# Altium PCB beovox-poe.PcbDoc (part 1 of 3)
Units mm, origin at the board's own origin, x right, y up, seen from the top; angles counter-clockwise.
Board outline 92 x 70 mm, 4 copper layers (Top Layer, Layer 2, Layer 3, Bottom Layer), stack 1.576 mm thick; 96 components, 81 nets, 294 pads, 439 vias.
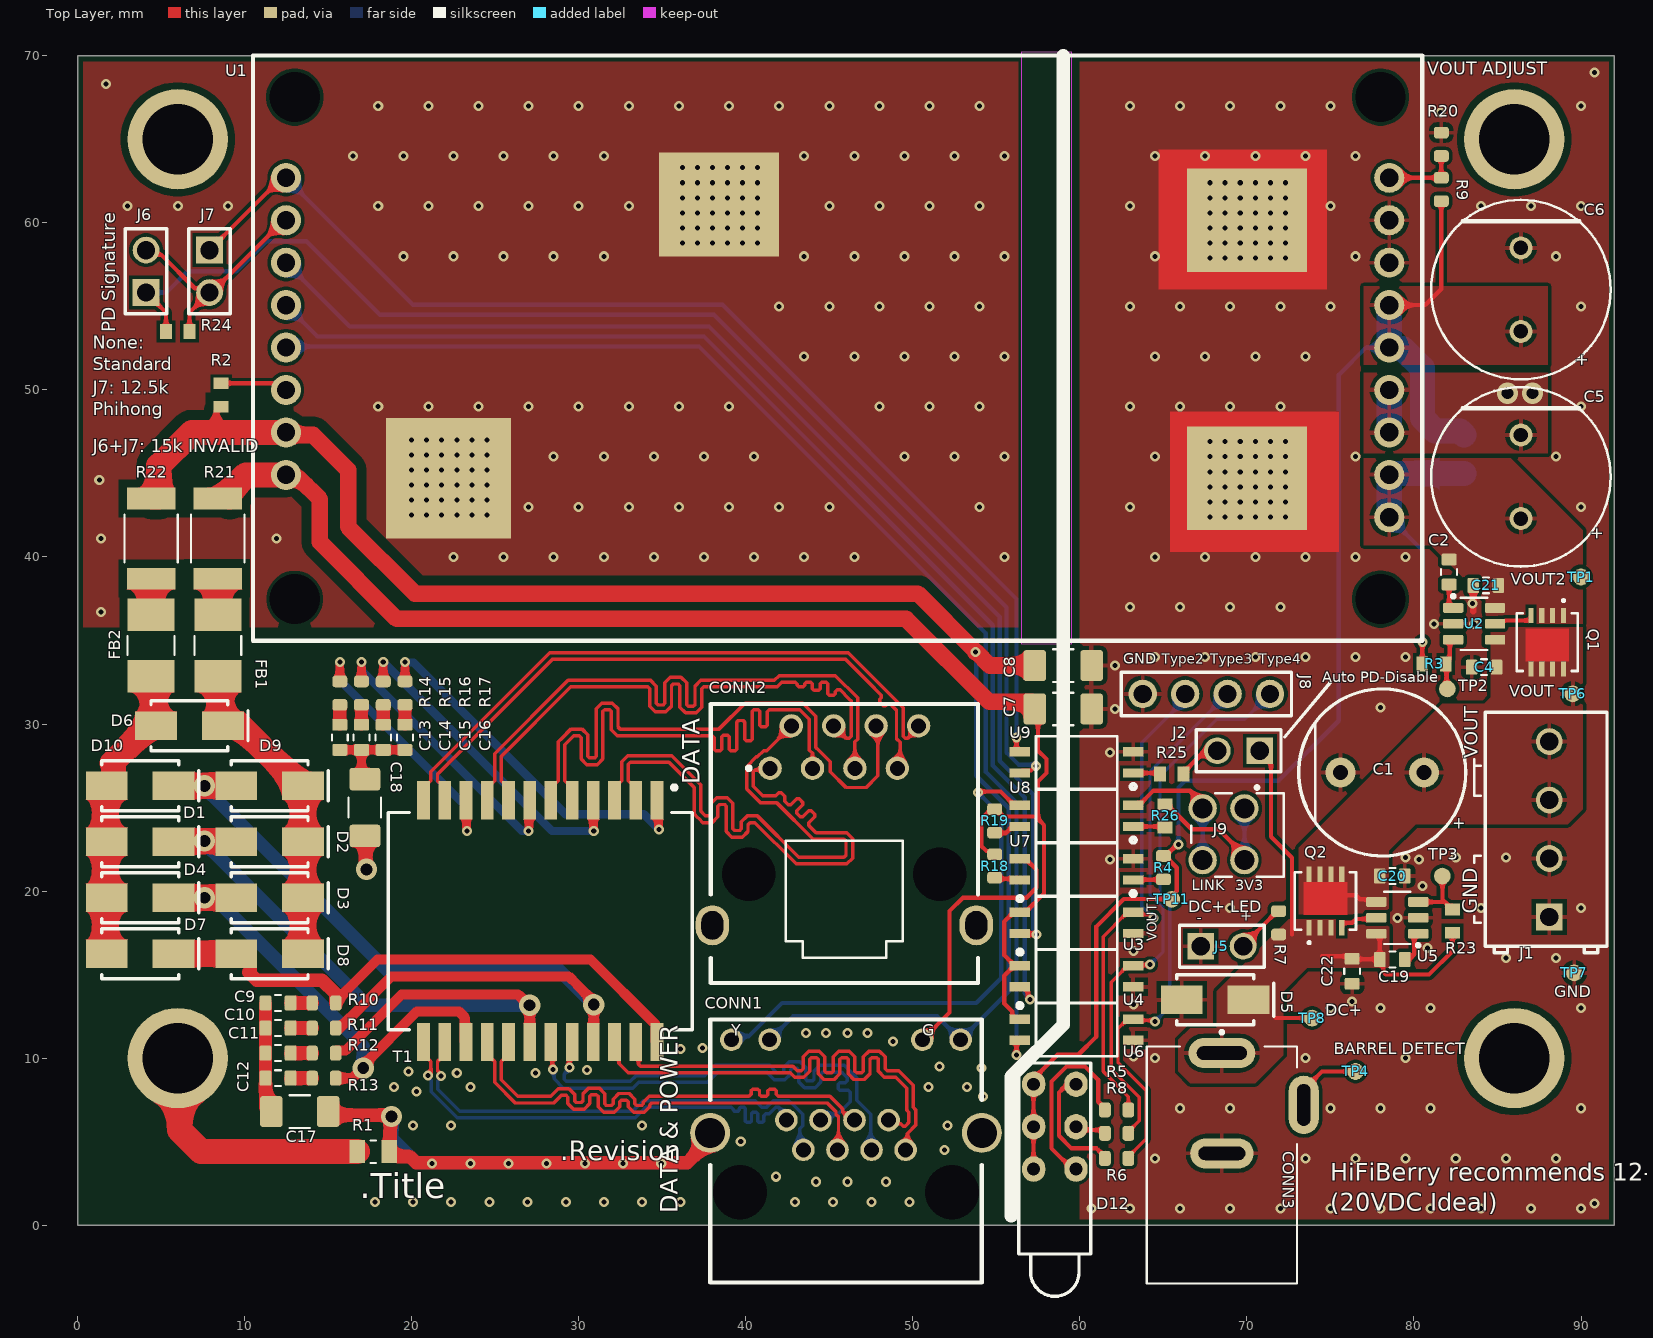
[diagram p0: Top Layer view]
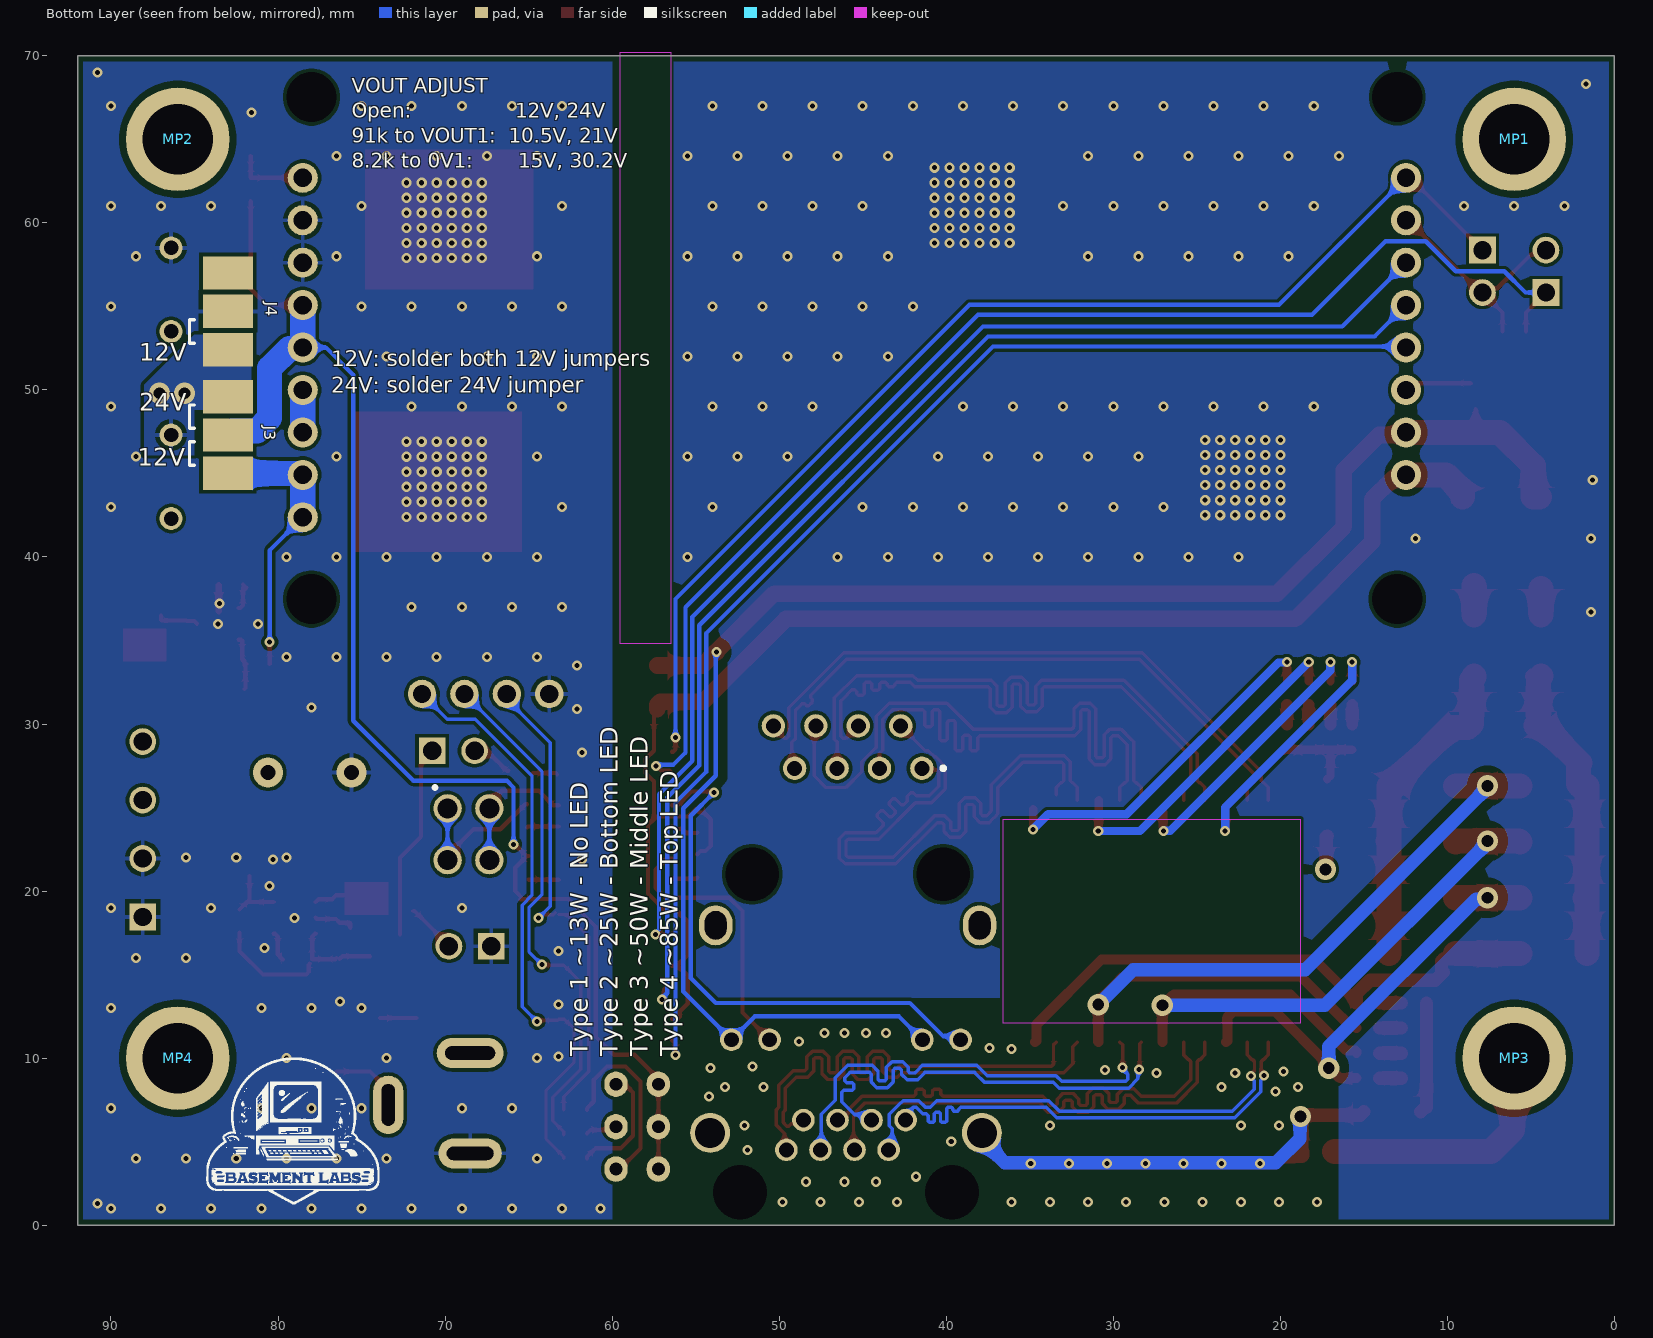
[diagram p1: Bottom Layer view, seen from below]
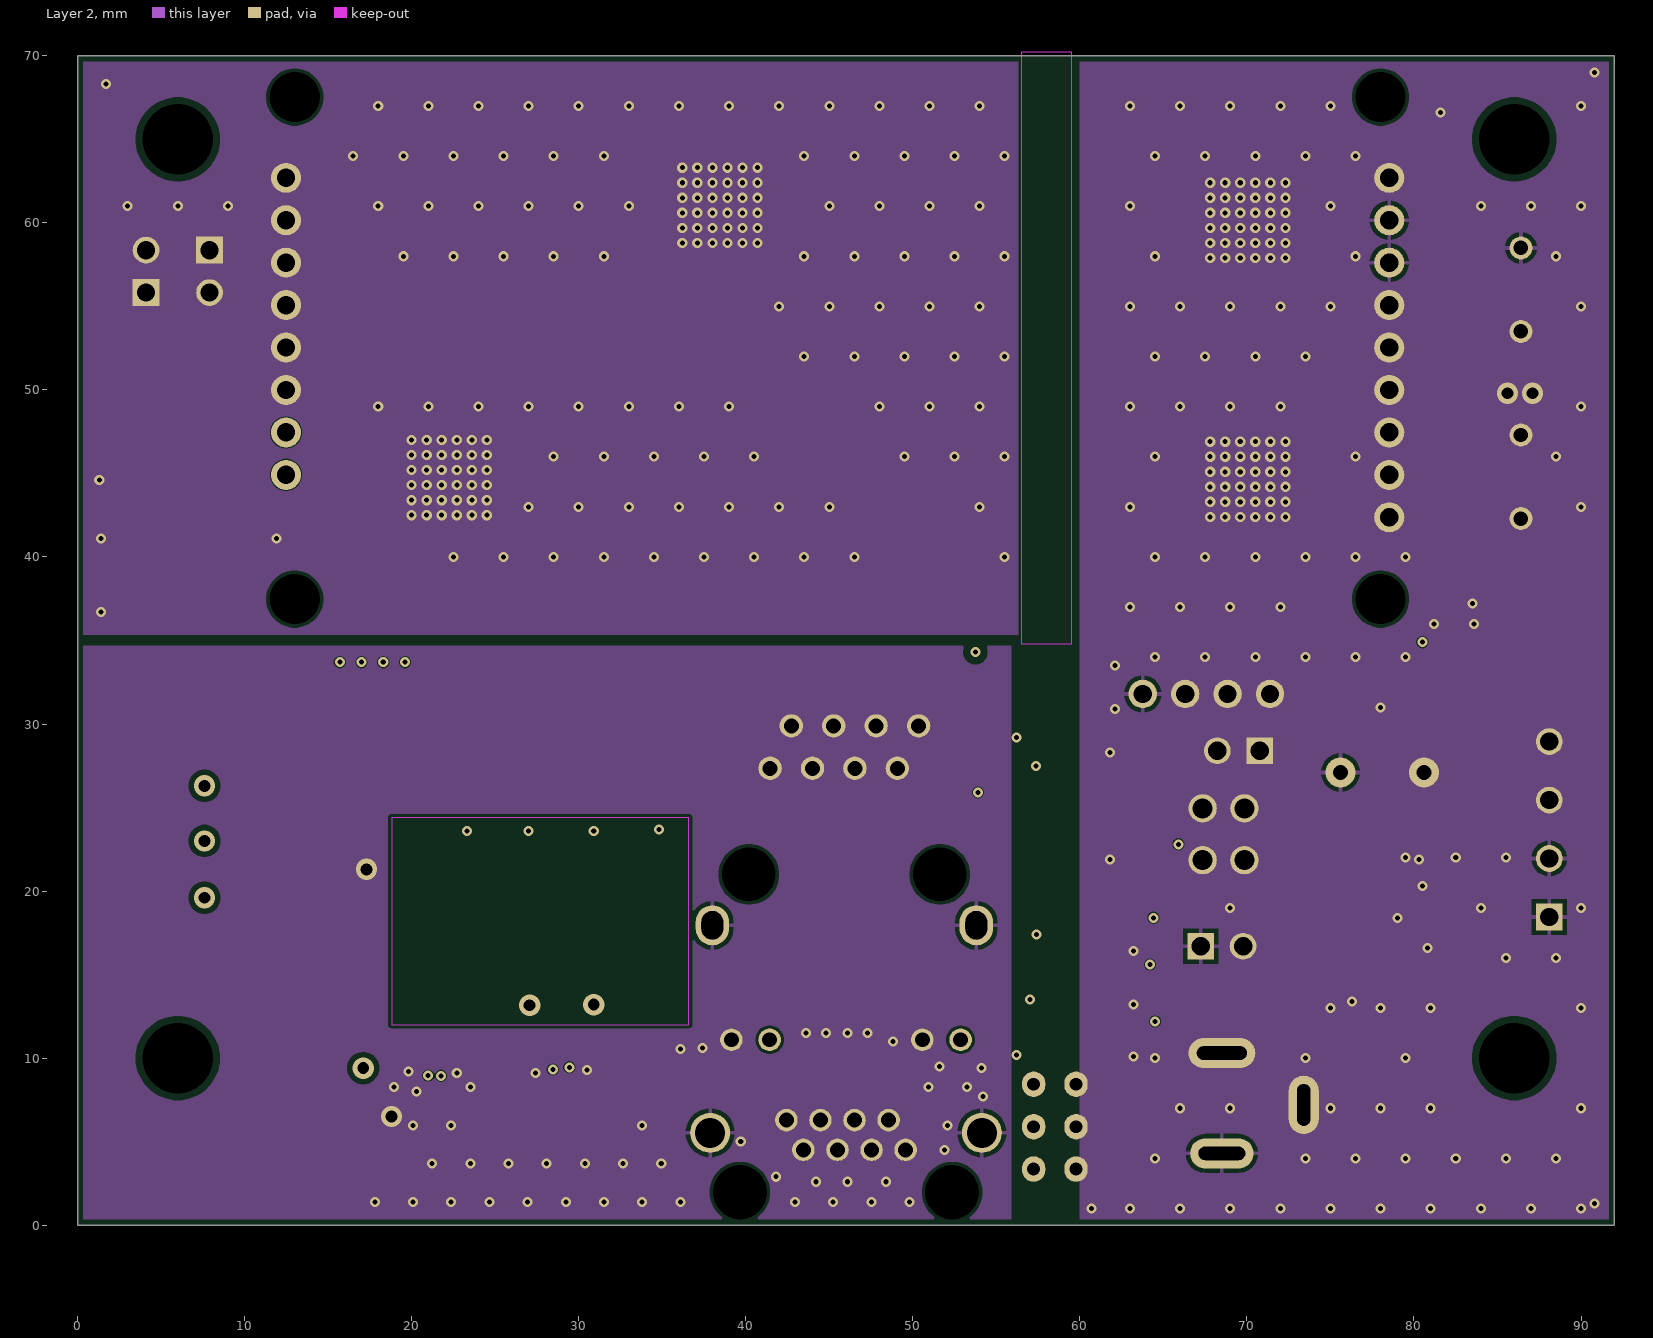
[diagram p2: Layer 2]
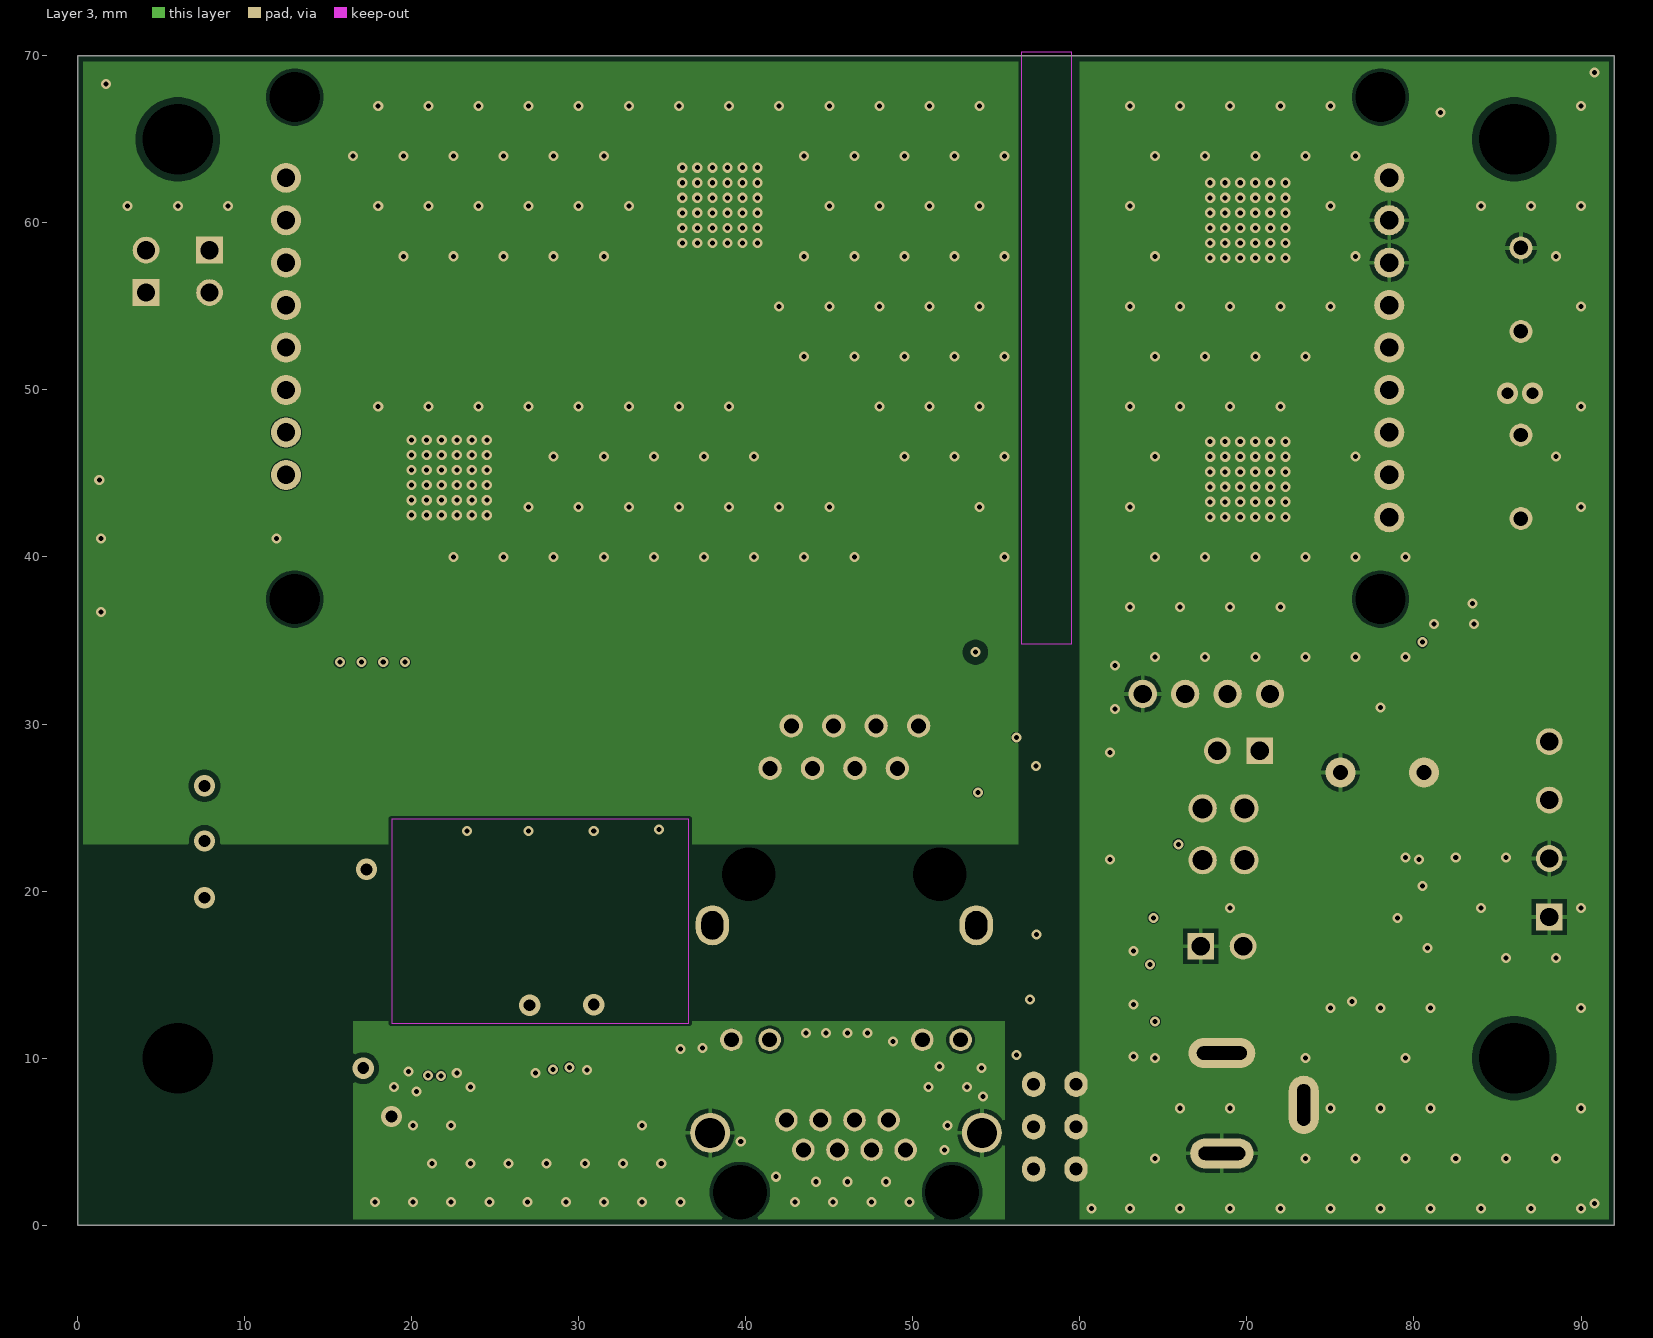
[diagram p3: Layer 3]
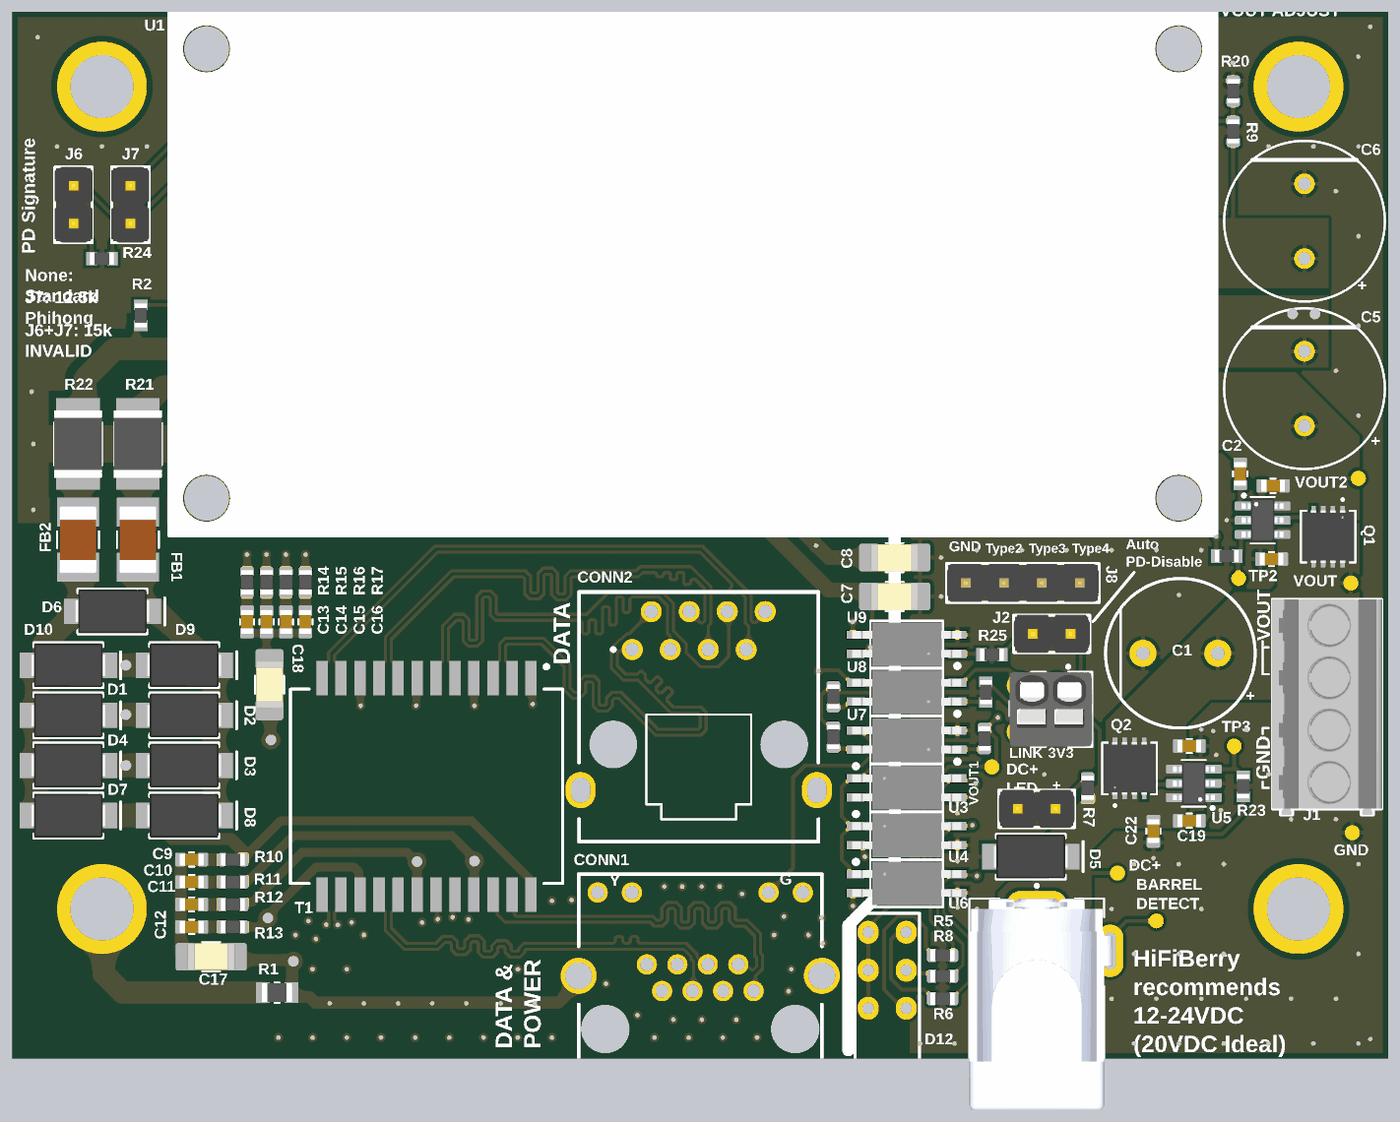
[diagram p5: 3D render of the assembled board from above, using the file's embedded part models]

## Layer stack, top to bottom
Top Solder: solder mask 0.0254, Solder Resist, Dk 3.8
Top Layer: signal copper 0.035
Dielectric 2: prepreg 0.203, PP-006, Dk 4.4
Layer 2: signal copper 0.035
Dielectric 1: core 1.03, FR-4, Dk 4.6
Layer 3: signal copper 0.035
Dielectric 3: prepreg 0.203, PP-006, Dk 4.4
Bottom Layer: signal copper 0.035
Bottom Solder: solder mask 0.0254, Solder Resist, Dk 3.8

## Board outline
0,0 0,70 92,70 92,0

## Design rules (kind name [scope] priority, off if disabled: settings)
BoardOutlineClearance [not (OnLayer('Top Overlay') or OnLayer('Bottom Overlay'))] p1: gap=0.345 ignorepadtopadclearanceinfootprint=FALSE
Clearance Clearance_hole [HasFootprint('SMTSOM380_PlatedScrew')] p1: gap=0.16 ignorepadtopadclearanceinfootprint=TRUE except(0.2: Arc-Hole Track-Hole SMDPad-Hole THPad-Hole Via-Hole Fill-Hole Poly-Hole Region-Hole Text-Hole; 0.4: Arc-Poly Track-Poly SMDPad-Poly THPad-Poly Via-Poly Fill-Poly Poly-Poly)
Clearance Clearance_diff [InDifferentialPairClass('DIFF100A') or InDifferentialPairClass('DIFF100B') vs InDifferentialPairClass('DIFF100A') or InDifferentialPairClass('DIFF100B')] p2: gap=0.152 ignorepadtopadclearanceinfootprint=TRUE except(0.2: Arc-Hole Track-Hole SMDPad-Hole THPad-Hole Via-Hole Fill-Hole Poly-Hole Region-Hole Text-Hole; 0.762: Arc-Arc Arc-Track Arc-Poly Track-Track Track-Poly SMDPad-Poly THPad-Poly Via-Poly Fill-Poly Poly-Poly)
Clearance Clearance_HV [InNetClass('HV') or InNet('BARREL_IN') or HasFootprint('SMTSOM380_PlatedScrew')] p3: gap=0.2 ignorepadtopadclearanceinfootprint=TRUE except(0.37: SMDPad-SMDPad SMDPad-THPad THPad-THPad; 0.4: THPad-Poly; 0.5: SMDPad-Poly; 0.6: Arc-Poly Track-Poly Via-Poly Fill-Poly Poly-Poly)
Clearance [All] p4: gap=0.16 ignorepadtopadclearanceinfootprint=TRUE except(0.2: Arc-Poly Arc-Hole Track-Poly Track-Hole SMDPad-Poly SMDPad-Hole THPad-Poly THPad-Hole Via-Poly Via-Hole Fill-Poly Fill-Hole Poly-Poly Poly-Hole Region-Hole Text-Hole)
DiffPairsRouting DiffPairsRouting_100 [InDifferentialPairClass('All Differential Pairs')] p1: maxlimit=0.19 minlimit=0.127 mostfreqgap=0.19 toplayer_mingap=0.19 toplayer_minwidth=0.206 toplayer_maxwidth=0.206 toplayer_prefwidth=0.206 bottomlayer_mingap=0.19 bottomlayer_minwidth=0.206 bottomlayer_maxwidth=0.206 bottomlayer_prefwidth=0.206 impedanceprofiledriven=TRUE impedanceprofileid={2DB0FAA2-FB86-4255-B0C8-703C372E21C5} impedanceprofilevalue=100.000000 maxuncoupledlength=20
HoleSize [All] p1: absolutevalues=TRUE maxlimit=6.3 minlimit=0.2 maxpercent=80.000 minpercent=20.000
Length [InDifferentialPairClass('DIFF100A') or InDifferentialPairClass('DIFF100B')] p1: maxlimit=50 minlimit=0
MatchedLengths intra-pair_DiffB [InDifferentialPairClass('DIFF100B')] p1: tolerance=0.25 checknetsindiffpair=TRUE checkdiffpairvsdiffpair=FALSE checkxsignals=FALSE checkothers=FALSE
MatchedLengths intra-pair_DiffA [InDifferentialPairClass('DIFF100A')] p2: tolerance=0.25 checknetsindiffpair=TRUE checkdiffpairvsdiffpair=FALSE checkxsignals=FALSE checkothers=FALSE
MatchedLengths inter-pair_DiffB [InDifferentialPairClass('DIFF100B')] p3: tolerance=2 checknetsindiffpair=FALSE checkdiffpairvsdiffpair=TRUE checkxsignals=TRUE checkothers=TRUE
MatchedLengths inter-pair_DiffA [InDifferentialPairClass('DIFF100A')] p4: tolerance=2 checknetsindiffpair=FALSE checkdiffpairvsdiffpair=TRUE checkxsignals=TRUE checkothers=TRUE
MinimumSolderMaskSliver [not (HasFootprint('CONN-SMD_KH-WB205-F20M-03L'))] p1: minsoldermaskwidth=0.076
PolygonConnect PolygonConnect_TP [IsTestpoint] p1: connectstyle=Relief reliefconductorwidth=0.254 reliefentries=4 polygonreliefangle="90 Angle" airgapwidth=0.254
PolygonConnect PolygonConnect_tht [IsThruPin] p2: connectstyle=Relief reliefconductorwidth=0.254 reliefentries=4 polygonreliefangle="90 Angle" airgapwidth=0.254
PolygonConnect PolygonConnect_direct [All vs not InNet('GND')] p3: connectstyle=Direct reliefconductorwidth=0.254 reliefentries=4 polygonreliefangle="90 Angle" airgapwidth=0.254
PolygonConnect PolygonConnect_direct2 [isvia] p4: connectstyle=Direct reliefconductorwidth=0.254 reliefentries=4 polygonreliefangle="90 Angle" airgapwidth=0.254
PolygonConnect [All] p5: connectstyle=Relief reliefconductorwidth=0.254 reliefentries=4 polygonreliefangle="90 Angle" airgapwidth=0.254
RoutingVias [All] p1: holewidth=0.3 width=0.6 viastyle="Through Hole" minholewidth=0.3 minwidth=0.6 maxholewidth=0.711 maxwidth=1.27
SilkToSilkClearance [All] p1: silktosilkclearance=0.05
SilkToSolderMaskClearance [IsPad] p1: minsilkscreentomaskgap=0.05 clearancetoexposedcopper=TRUE
SolderMaskExpansion SolderMaskExpansion_via [IsVia and WithinRoom('tent')] p1: expansion=0.102 istentingtop=TRUE
SolderMaskExpansion [IsVia] p2 off: expansion=0.05 istentingtop=TRUE
Width [All] p1: maxlimit=1.5 minlimit=0.152 preferedwidth=0.254
25 further rules are at their usual default settings.

## Classes and differential pairs
differential pair class DIFF100A: TxRxA TxRxB TxRxC TxRxD
differential pair class DIFF100B: TxRxA1 TxRxB1 TxRxC1 TxRxD1
net class HV: NetD1_2 NetD3_1 NetD7_2 NetD9_1 NetFB1_2 NetFB2_2 VIN2+ VIN2- VIN+ VIN-
differential pair TxRxD: +TxRxD_P -TxRxD_N
differential pair TxRxD1: +TxRxD1_P -TxRxD1_N
differential pair TxRxC: +TxRxC_P -TxRxC_N
differential pair TxRxC1: +TxRxC1_P -TxRxC1_N
differential pair TxRxB: +TxRxB_P -TxRxB_N
differential pair TxRxB1: +TxRxB1_P -TxRxB1_N
differential pair TxRxA1: +TxRxA1_P -TxRxA1_N
differential pair TxRxA: +TxRxA_P -TxRxA_N

## Components (designator, comment, footprint, x,y, rotation, side; value= is the part's Value field where it differs from the comment)
C1 "150uF" CAP_CAN_10D_16H_THT 78.1,27.1 r180 top
C2 "100nF" CAP_0603_SK 82.1,39.1 r90 top
C4 "100nF" CAP_0603_SK 84.2,33.4 r0 top
C5 "1000uF 35V" CAP_TH_5_10X20 86.4,44.8 r90 top value=1000uF
C6 "1000uF 35V" CAP_TH_5_10X20 86.4,56 r90 top value=1000uF
C7 "4.7nF 2kV" CAP_1206_SK 59,30.9 r0 top
C8 "4.7nF 2kV" CAP_1206_SK 59,33.5 r0 top
C9 "10nF" CAP_0603_SK 12,13.3 r0 top
C10 "10nF" CAP_0603_SK 12,11.8 r0 top
C11 "10nF" CAP_0603_SK 12,10.3 r0 top
C12 "10nF" CAP_0603_SK 12,8.8 r0 top
C13 "10nF" CAP_0603_SK 15.7,29.2 r90 top
C14 "10nF" CAP_0603_SK 17,29.2 r90 top
C15 "10nF" CAP_0603_SK 18.3,29.2 r90 top
C16 "10nF" CAP_0603_SK 19.6,29.2 r90 top
C17 "1000pF 2kV" CAP_1206_SK 13.3,6.8 r180 top
C18 "1000pF 2kV" CAP_1206_SK 17.2,25 r90 top
C19 "100nF" CAP_0603_SK 78.7,15.9 r180 top
C20 "100nF" CAP_0603_SK 78.7,20.9 r180 top
C21 "100nF" CAP_0603_SK 84.3,38.3 r0 top
C22 "100nF" CAP_0603_SK 76.3,15.2 r90 top
CONN1 "R-RJ45R08P-C000" R-RJ45R08P-C000 46,5.4 r0 top locked
CONN2 "KH-5224-8P8C" CONN_RJ45_KH-5224-8P8C 45.9,21 r180 top locked
CONN3 "PJ-050AH" CUI_PJ-050AH 68.5,10.3 r270 top
D1 "SS36" DIOD-SMA-2_V 3.75,22.95 r0 top value="60V 3A"
D2 "SS36" DIOD-SMA-2_V 11.5,22.95 r0 top value="60V 3A"
D3 "SS36" DIOD-SMA-2_V 11.5,19.6 r0 top value="60V 3A"
D4 "SS36" DIOD-SMA-2_V 3.75,19.6 r0 top value="60V 3A"
D5 "SMAJ30A" DIOD-B360A_V 68.1,13.5 r0 top
D6 "SMAJ58A" DIOD-SMA-2_V 6.7,29.9 r0 top value="58V 400W"
D7 "SS36" DIOD-SMA-2_V 3.75,16.25 r0 top value="60V 3A"
D8 "SS36" DIOD-SMA-2_V 11.5,16.25 r0 top value="60V 3A"
D9 "SS36" DIOD-SMA-2_V 11.5,26.3 r0 top value="60V 3A"
D10 "SS36" DIOD-SMA-2_V 3.75,26.3 r0 top value="60V 3A"
D12 "3 Diode Vertical LED Green" MHK33147CGBTD 58.5,5.9 r0 top
FB1 "1k" FB_1810 8.4,34.7 r90 top
FB2 "1k" FB_1810 4.4,34.7 r90 top
J1 "DB125-3.5-4P-GN-S" DB125-3.5-4P-GN-S 88.1,23.7 r90 top
J2 "PZ254V-11-02P" 61300211121 69.5,28.4 r180 top
J3 "JUMPER" "SOLDER_JUMPER_3 LARGE" 83,47.3 r90 bottom
J4 "JUMPER" "SOLDER_JUMPER_3 LARGE" 83,54.7 r90 bottom
J5 "PZ254V-11-02P" 61300211121 68.5,16.7 r0 top
J6 "PZ254V-11-02P" 61300211121 4.1,57.1 r90 top
J7 "PZ254V-11-02P" 61300211121 7.9,57.1 r270 top
J8 "PZ254V-11-04P" HDR_MALE_1x4 67.57,31.8 r180 top
J9 "1770953" 1770953 68.6,23.4 r180 top
MP1 "SMTSOM380BTR" SMTSOM380_PlatedScrew 6,65 r180 bottom
MP2 "SMTSOM380BTR" SMTSOM380_PlatedScrew 86,65 r180 bottom
MP3 "SMTSOM380BTR" SMTSOM380_PlatedScrew 6,10 r180 bottom locked
MP4 "SMTSOM380BTR" SMTSOM380_PlatedScrew 86,10 r180 bottom locked
Q1 "HSBB6066" PPAK3X3_GAS 87.975,34.9 r270 top
Q2 "HSBB6066" PPAK3X3_GAS 74.7,19.4 r90 top
R1 "0" RES_0805 17.7,4.4 r0 top
R2 "0" RES_0603#1 8.6,49.7 r270 top
R3 "0" RES_0603#1 81.2,33.6 r180 top
R4 "2.2k" RES_0603#2 65,21.4 r90 top
R5 "2.2k" RES_0603#2 62.2,6.9 r0 top
R6 "2.2k" RES_0603#2 62.2,4 r0 top
R7 "10k" RES_0603#2 71.9,18.1 r90 top
R8 "2.2k" RES_0603#2 62.2,5.5 r0 top
R9 "91k" RES_0603#2 81.633,62 r90 top
R10 "75" RES_0603#2 14.75,13.3 r0 top value=75R
R11 "75" RES_0603#2 14.75,11.8 r0 top value=75R
R12 "75" RES_0603#2 14.75,10.3 r0 top value=75R
R13 "75" RES_0603#2 14.75,8.8 r0 top value=75R
R14 "75" RES_0603#2 15.7,31.85 r90 top value=75R
R15 "75" RES_0603#2 17,31.85 r90 top value=75R
R16 "75" RES_0603#2 18.3,31.85 r90 top value=75R
R17 "75" RES_0603#2 19.6,31.85 r90 top value=75R
R18 "10K" RES_0603#2 54.9,21.5 r90 top
R19 "10K" RES_0603#2 54.9,24.2 r90 top
R20 "8.2k" RES_0603#2 81.633,64.7 r270 top value=10kR
R21 "0" RES_1812 8.4,41.1 r90 top
R22 "0" RES_1812 4.4,41.1 r90 top
R23 "0" RES_0603#1 82.3,18.2 r270 top
R24 "10k" RES_0603#1 6,53.5 r0 top
R25 "2.2k" RES_0603#1 65.5,27 r0 top
R26 "330" RES_0603#1 65.1,24.5 r90 top
T1 "H2415G" XFMR_H2415G 27.7,18.2 r180 top
TP1 "TP" Test_Point#1 90,38.8 r0 top
TP2 "TP" Test_Point#2 82,32.1 r0 top
TP3 "TP" Test_Point#2 81.7,20.9 r0 top
TP4 "TP" Test_Point#2 76.5,9.2 r0 top
TP6 "TP" Test_Point#1 89.5,31.8 r0 top
TP7 "TP" Test_Point#1 89.6,15.1 r0 top
TP8 "TP" Test_Point#1 73.9,12.4 r0 top
TP11 "TP" Test_Point#1 65.5,19.5 r90 top
U1 "AG5800" AG5800 45.5,52.5 r0 top locked
U2 "LM74700QDBVTQ1" SOT95P280X145-6N 83.6,36 r0 top
U3 "OR-3H7B-TP-G" SOIC_(B)(TA)-VG_EVS 59.8,18.1 r0 top value="80V 3750V 50mA"
U4 "OR-3H7B-TP-G" SOIC_(B)(TA)-VG_EVS 59.8,14.9 r0 top value="80V 3750V 50mA"
U5 "LM74700QDBVTQ1" SOT95P280X145-6N 79,18.4 r180 top
U6 "OR-3H7B-TP-G" SOIC_(B)(TA)-VG_EVS 59.8,11.7 r0 top value="80V 3750V 50mA"
U7 "OR-3H7B-TP-G" SOIC_(B)(TA)-VG_EVS 59.8,21.3 r180 top value="80V 3750V 50mA"
U8 "OR-3H7B-TP-G" SOIC_(B)(TA)-VG_EVS 59.8,24.5 r180 top value="80V 3750V 50mA"
U9 "OR-3H7B-TP-G" SOIC_(B)(TA)-VG_EVS 59.8,27.7 r180 top value="80V 3750V 50mA"

## Footprints (in the part's own frame and the unit in brackets; to place one, negate y for a bottom-side part, rotate by r counter-clockwise, add the part's x,y. Pads: shape width x height; smd on the part's side, far side on the other; paste and mask are expansions set on the pad)
1770953 [mm] "2 Position Wire to Board Terminal Block Vertical with Board 0.098\" (2.50mm) Through Hole"
  round 1.7 hole 1.2: 1(-1.25,1.55) 1(-1.25,-1.55) 2(1.25,1.55) 2(1.25,-1.55)
  silkscreen extent -3.6,-2.9 1.92,2.55, body extent -3.6,-2.45 1.92,2.55, height 10
61300211121 [mm] "Pin Header, pitch 2.54 mm, THT, Vertical, single row, 2p"
  rect 1.6x1.6 hole 1.1: 1(-1.27,0)
  round 1.6 hole 1.1: 2(1.27,0)
  silkscreen extent -2.54,-1.25 2.54,1.25, body extent -2.54,-1.27 2.54,1.27, height 8.55
AG5800 [mm] "802.3bt PD Module"
  round 1.8 hole 1.1: 1(-33.02,10.195) 2(-33.02,7.655) 3(-33.02,5.115) 4(-33.02,2.575) 5(-33.02,0.035) 6(-33.02,-2.505) 7(-33.02,-5.045) 8(-33.02,-7.585) 9(33.02,-10.125) 10(33.02,-7.585) 11(33.02,-5.045) 12(33.02,-2.505) 13(33.02,0.035) 14(33.02,2.575) 15(33.02,5.115) 16(33.02,7.655) 17(33.02,10.195)
  rect 7.5x7.215 smd paste-2539.97: 18(-23.3,-7.8)
  rect 7.2x6.2 smd paste-2539.97: 18(-7.1,8.6) 19(24.5,-7.8) 19(24.5,7.655)
  round 0 hole 3: HOLE(-32.5,-15.025) HOLE(-32.5,15.025) HOLE(32.5,-15.025) HOLE(32.5,15.025)
  Keep-Out Layer region: 11,-17.7 14,-17.7 14,17.7 11,17.7
  silkscreen extent -35,-17.51 35,17.52, body extent -35,-17.51 35,17.52, height 18.15
CAP_0603_SK [mm] "Chip Capacitor, 2-Leads, Body 1.6x0.8mm, IPC Medium Density"
  rrect25% 0.7x0.9 smd: 1(-0.75,0) 2(0.75,0)
  silkscreen extent -0.18,-0.48 0.18,0.48, body extent -0.8,-0.4 0.8,0.4, height 0.9
CAP_1206_SK [mm] "Chip Capacitor, 2-Leads, Body 3.2x1.6mm, IPC Medium Density"
  rrect25% 1.35x1.85 smd: 1(-1.7,0) 2(1.7,0)
  silkscreen extent -0.6,-0.97 0.6,0.97, body extent -1.6,-0.92 1.6,0.9, height 1.63
CAP_CAN_10D_16H_THT [mm]
  round 1.8 hole 0.9: N(2.5,0) P(-2.5,0)
  silkscreen extent -5,-5 5,5, body extent -5,-5 5,5, height 16
CAP_TH_5_10X20 [mil]
  round 54 hole 34: N(98.43,0) P(-98.43,0)
  silkscreen extent -212,-212 212,212, body extent -197,-197 197,197, height 787
CONN_RJ45_KH-5224-8P8C [mm] "RJ45"
  round 1.4 hole 0.9: 1(4.445,-6.35) 2(3.175,-8.89) 3(1.905,-6.35) 4(0.635,-8.89) 5(-0.635,-6.35) 6(-1.905,-8.89) 7(-3.175,-6.35) 8(-4.445,-8.89)
  oval 2x2.4 hole 1.3 slot 1.7 at 90 deg: S1(7.9,3.05) S2(-7.9,3.05)
  round 0 hole 3.2 unplated: ""(-5.715,0) ""(5.715,0)
  silkscreen extent -8,-10.2 8,6.5, body extent -8,-10.2 8,6.5, height 16.5
CUI_PJ-050AH [mm]
  oval 1.8x4 hole 0.8 slot 3 at 90 deg: 1(0,0)
  oval 1.8x3.8 hole 0.8 slot 2.8 at 90 deg: 2(6,0)
  oval 3.5x1.8 hole 0.8 slot 2.5 at 0 deg: 3(3.1,4.9)
  silkscreen extent -1.35,-4.5 13.8,4.5, body extent -0.4,-4.5 13.8,5.05, height 11.01
DB125-3.5-4P-GN-S [mm] "TERM BLK 4POS SIDE ENT 3.5MM PCB"
  rect 1.6x1.6 hole 1.1: 1(-5.25,0)
  round 1.6 hole 1.1: 2(-1.75,0) 3(1.75,0) 4(5.25,0)
  silkscreen extent -7.4,-3.45 7,3.84, body extent -7.41,-3.5 7.01,3.9, height 8.61
DIOD-B360A_V [mm] "Molded Diode, 2-Leads, Body 4.60x2.92mm"
  rect 2.5x1.7 smd: 1(-2,0) 2(2,0)
  silkscreen extent -2.3,-1.5 3.5,1.5, body extent -2.52,-1.46 2.52,1.46, height 2.3
DIOD-SMA-2_V [mm] "Molded Diode, 2-Leads, Body 4.6x2.92mm"
  rect 2.5x1.7 smd: 1(-2,0) 2(2,0)
  silkscreen extent -2.3,-1.5 3.5,1.5, body extent -2.52,-1.46 2.52,1.46, height 2.4
FB_1810 [mm]
  rect 1.92x2.81 smd: 1(-1.842,0) 2(1.842,0)
  silkscreen extent -0.56,-1.4 0.56,1.4, body extent -2.25,-1.25 2.25,1.25, height 2.81
HDR_MALE_1x4 [mm] "Pin Header, pitch 2.54 mm, THT, Vertical, single row, 4p"
  round 1.7 hole 1.1: 1(-3.81,0) 2(-1.27,0) 3(1.27,0) 4(3.81,0)
  silkscreen extent -5.1,-1.3 5.1,1.3, body extent -5.08,-1.27 5.08,1.27, height 8.57
MHK33147CGBTD [mil] "3 POS LED VERTICAL"
  oval 55.12x60 hole 30: 1(-50,100) 2(50,100) 3(-50,0) 4(50,0) 5(-50,-100) 6(50,-100)
  silkscreen extent -85,-400 85,150, body extent -85,-400 85,150, height 581
PPAK3X3_GAS [mil]
  rect 36x12 smd paste+0 mask+0: 1(-63,38.39) 2(-63,12.8) 3(-63,-12.79) 4(-63,-38.38) 5(63,-38.38) 6(63,-12.79) 7(63,12.8) 8(63,38.39)
  Top Layer region: 45,-51 45,51 -32,51 -32,-51
  silkscreen extent -101,-72 68,72, body extent -69,-67 69,67, height 35
R-RJ45R08P-C000 [mm] "RJ45 shielded with LEDs"
  round 1.35 hole 0.89: 1(3.57,-0.89) 2(2.55,0.89) 3(1.53,-0.89) 4(0.51,0.89) 5(-0.51,-0.89) 6(-1.53,0.89) 7(-2.55,-0.89) 8(-3.57,0.89) 9(6.86,5.7) 10(4.57,5.7) 11(-4.57,5.7) 12(-6.86,5.7)
  round 0 hole 3.25 unplated: Hole(-6.35,-3.43) Hole(6.35,-3.43)
  round 2.4 hole 1.8: S1(8.13,0.13) S2(-8.13,0.13)
  silkscreen extent -8.13,-8.83 8.13,6.92, body extent -8.13,-8.83 8.13,6.92, height 13.1
RES_0603#1 [mm] "Chip Resistor, 2-Leads, Body 1.70x0.90mm, IPC Medium Density"
  rect 0.7x0.9 smd: 1(-0.7,0) 2(0.7,0)
  body extent -0.8,-0.4 0.8,0.4, height 0.56
RES_0603#2 [mm] "Chip Resistor, 2-Leads, Body 1.70x0.90mm, IPC Medium Density"
  rrect50% 0.7x0.9 smd mask+0.05: 1(-0.7,0) 2(0.7,0)
  body extent -0.8,-0.4 0.8,0.4, height 0.56
RES_0805 [mm]
  rect 0.92x1.38 smd: 1(-0.955,0) 2(0.955,0)
  silkscreen extent -0.17,-0.68 0.17,0.68, body extent -1,-0.63 1,0.63, height 0.61
RES_1812 [mm]
  rect 1.3x2.9 smd: 1(-2.4,0) 2(2.4,0)
  silkscreen extent -1.43,-1.6 1.43,1.6, body extent -2.25,-1.6 2.25,1.6, height 0.61
SMTSOM380_PlatedScrew [mm] "RND STANDOFF M3 8MM / Plated pad for screw"
  round 6.2 / inner round 0 / far side round 6 hole 4.22: 1(0,0)
  body extent -2.78,-2.78 2.78,2.78, height 8
SOIC_(B)(TA)-VG_EVS [mil]
  rect 48x22 smd paste+0 mask+2.36: 1(-133.5,25) 2(-133.5,-25) 3(133.5,-25) 4(133.5,25)
  silkscreen extent -139,-62 96,63, body extent -144,-57 144,57, height 79
"SOLDER_JUMPER_3 LARGE" [mm]
  rect 2x3 smd paste-2539.97 mask+0.05: 1(-2.3,0) 2(0,0) 3(2.3,0)
SOT95P280X145-6N [mm]
  rrect25% 1.21x0.58 smd: 1(-1.255,0.95) 2(-1.255,0) 3(-1.255,-0.95) 4(1.255,-0.95) 5(1.255,0) 6(1.255,0.95)
  silkscreen extent -1.35,-1.56 0.8,1.75, body extent -1.4,-1.45 1.4,1.45, height 1.45
Test_Point#1 [mm]
  round 1 smd paste-1 mask+0: 1(0,0)
Test_Point#2 [mm]
  round 1 smd paste-2539.97 mask+0.05: 1(0,0)
XFMR_H2415G [mm] "SMD LAN Transformer"
  rect 0.76x2.29 smd: 1(-6.985,-7.24) 2(-5.715,-7.24) 3(-4.445,-7.24) 4(-3.175,-7.24) 5(-1.905,-7.24) 6(-0.635,-7.24) 7(0.635,-7.24) 8(1.905,-7.24) 9(3.175,-7.24) 10(4.445,-7.24) 11(5.715,-7.24) 12(6.985,-7.24) 13(6.985,7.24) 14(5.715,7.24) 15(4.445,7.24) 16(3.175,7.24) 17(1.905,7.24) 18(0.635,7.24) 19(-0.635,7.24) 20(-1.905,7.24) 21(-3.175,7.24) 22(-4.445,7.24) 23(-5.715,7.24) 24(-6.985,7.24)
  silkscreen extent -9.1,-8.12 9.1,6.5, body extent -9.1,-8.05 9.1,8.05, height 10.16

## Part data
C1: library part RC080M151LO10*16TH-2A1Et, "150uF 80V Aluminum Electrolytic Capacitors Through Hole,D10xL16mm 3000hrs@105℃", Manufacturer="BERYL Electronic Tech", Supplier Part Number=C7436420, Voltage=80V, ComponentLink1Description=LCSC, ComponentLink1URL=https://www.lcsc.com/product-detail/C7436420.html, Manufacturer Part Number=RC080M151LO10*16TH-2A1Et, Supplier=LCSC
C2 C4 C19 C20 C21 C22: library part "C0603 100nF 50V X7R 10%", "Multilayer Ceramic Capacitor, CC Series, 0.1 - F, - 10%, X7R, 50 V, 0603 [1608 Metric]", Case Code (Imperial)=0603, Case Code (Metric)=1608, Dielectric=X7R, Dielectric Material=Ceramic, Manufacturer=Yageo, Manufacturer Part Number=CC0603KRX7R9BB104, Max Operating Temperature=125°C, Min Operating Temperature=-55°C, Package Quantity=1, Supplier Part Number=C14663, Supplier Part Number 1=3035896, Tolerance=10%, Voltage=50V, Capacitance=100nF, Case/Package=0603, Category="Ceramic Capacitors", ComponentLink1Description=https://datasheet.ciiva.com/11786/0900766b80d84f1d-11786061.pdf?src-supplier=Rs, ComponentLink1URL=https://datasheet.ciiva.com/11786/0900766b80d84f1d-11786061.pdf?src-supplier=Rs, ComponentLink2Description=https://datasheet.ciiva.com/31394/1489800-31394927.pdf?src-supplier=Farnell, ComponentLink2URL=https://datasheet.ciiva.com/31394/1489800-31394927.pdf?src-supplier=Farnell, ComponentLink3Description=https://datasheet.ciiva.com/144/mlccorderingcode-144176.pdf?src-supplier=Digikey, ComponentLink3URL=https://datasheet.ciiva.com/144/mlccorderingcode-144176.pdf?src-supplier=Digikey, ComponentLink4Description=https://datasheet.ciiva.com/144/mlccorderingcode-144177.pdf?src-supplier=Digikey, ComponentLink4URL=https://datasheet.ciiva.com/144/mlccorderingcode-144177.pdf?src-supplier=Digikey, ComponentLink5Description=https://datasheet.ciiva.com/144/mlccorderingcode-144178.pdf?src-supplier=Digikey, ComponentLink5URL=https://datasheet.ciiva.com/144/mlccorderingcode-144178.pdf?src-supplier=Digikey, ComponentLink6Description=https://datasheet.ciiva.com/7978/1489800-7978166.pdf?src-supplier=Element14, ComponentLink6URL=https://datasheet.ciiva.com/7978/1489800-7978166.pdf?src-supplier=Element14, ComponentLink7Description=https://datasheet.ciiva.com/8033/70765-8033819.pdf?src-supplier=Element14, ComponentLink7URL=https://datasheet.ciiva.com/8033/70765-8033819.pdf?src-supplier=Element14, ComponentLink8Description=https://datasheet.ciiva.com/8033/70765-8033821.pdf?src-supplier=Element14, ComponentLink8URL=https://datasheet.ciiva.com/8033/70765-8033821.pdf?src-supplier=Element14, ComponentLink9Description=https://datasheet.ciiva.com/22749/1489800-22749214.pdf?src-supplier=Element14, ComponentLink9URL=https://datasheet.ciiva.com/22749/1489800-22749214.pdf?src-supplier=Element14, ComponentLink10Description=LCSC, ComponentLink10URL=https://www.lcsc.com/product-detail/Multilayer-Ceramic-Capacitors-MLCC-SMD-SMT_YAGEO-CC0603KRX7R9BB104_C14663.html, Depth=0.8mm, Halogen Free="Halogen Free", Height=0.8mm, Lead Free="Lead Free", Length=0.063inch, Material=Ceramic, Mount="Surface Mount", Number of Pins=2, Packaging="Tape and Reel", Pricing 1="4000=0.0056, 16000=0.0051, 20000=0.0053, 60000=0.0049, 80000=0.005, 160000=0.0048, 200000=0.0048, 400000=0.0046, 500000=0.0045 (USD)", Radiation Hardening=No, Reach SVHC Compliant=No, RoHS=Yes, RoHS Compliant=Yes, Series=CC, Stock 1=10824000, Supplier=LCSC, Supplier 1="Future Electronics", Termination=SMD/SMT, Thickness=0.035inch, Voltage Rating=50V, Width=0.031inch
C5 C6: library part ERR1VM102G20OT, "1000uF 35V ±20% Plugin,D10xL20mm Aluminum Electrolytic Capacitors - Leaded ROHS", Manufacturer=AISHI, Supplier Part Number=C398835, Voltage=35V, ComponentLink1Description=LCSC, ComponentLink1URL=https://www.lcsc.com/product-detail/Aluminum-Electrolytic-Capacitors-Leaded_AISHI-Aihua-Group-ERR1VM102G20OT_C398835.html, Manufacturer Part Number=ERR1VM102G20OT, Supplier=LCSC
C7 C8: library part 1206B472K202NT, "2kV 4700pF X7R ±10% 1206 Multilayer Ceramic Capacitors MLCC - SMD/SMT ROHS", Manufacturer="FH (Guangdong Fenghua Advanced Tech)", Supplier Part Number=C41017, ComponentLink1Description=LCSC, ComponentLink1URL=https://www.lcsc.com/product-detail/Multilayer-Ceramic-Capacitors-MLCC-SMD-SMT_FH-Guangdong-Fenghua-Advanced-Tech-1206B472K202NT_C41017.html, Manufacturer Part Number=1206B472K202NT, Supplier=LCSC
C9 C10 C11 C12 C13 C14 C15 C16: library part 0603B103K101CT, "Multilayer Ceramic Capacitor, 0.01 F, 10%, X7R, 100 V, 0603 [1608 Metric] Rohs Compliant: Yes", Case Code (Imperial)=0603, Case Code (Metric)=1608, Dielectric=X7R, Manufacturer="Walsin Technologies", Max Operating Temperature=125°C, Min Operating Temperature=-55°C, Supplier Part Number=C302008, Tolerance=10%, Voltage Rating=100V, Capacitance=10nF, Case/Package=0603, Category="Ceramic Capacitors", ComponentLink1Description=http://www.farnell.com/datasheets/2340522.pdf?src-supplier=Farnell, ComponentLink1URL=http://www.farnell.com/datasheets/2340522.pdf?src-supplier=Farnell, ComponentLink2Description=http://www.passivecomponent.com/wp-content/uploads/2018/10/MLCC.pdf?src-supplier=Digi-Key, ComponentLink2URL=http://www.passivecomponent.com/wp-content/uploads/2018/10/MLCC.pdf?src-supplier=Digi-Key, ComponentLink3Description=http://www.passivecomponent.com/indexsea/0603B103K101CT-IS.pdf?src-supplier=Digi-Key, ComponentLink3URL=http://www.passivecomponent.com/indexsea/0603B103K101CT-IS.pdf?src-supplier=Digi-Key, ComponentLink4Description=http://www.farnell.com/datasheets/2340522.pdf?src-supplier=Element14, ComponentLink4URL=http://www.farnell.com/datasheets/2340522.pdf?src-supplier=Element14, ComponentLink5Description=http://www.farnell.com/datasheets/2340522.pdf?src-supplier=Newark, ComponentLink5URL=http://www.farnell.com/datasheets/2340522.pdf?src-supplier=Newark, ComponentLink6Description=LCSC, ComponentLink6URL=https://www.lcsc.com/product-detail/Multilayer-Ceramic-Capacitors-MLCC-SMD-SMT_Walsin-Tech-Corp-0603B103K101CT_C302008.html, Depth=0.8mm, Length=1.6mm, Manufacturer Part Number=0603B103K101CT, Packaging="Tape and Reel", Pricing 1="4000=0.00810, 8000=0.00720, 12000=0.00620, 40000=0.00610 (USD)", REACH SVHC=Unknown, RoHS=Yes, RoHS Compliant=Yes, Stock 1=100000, Supplier=LCSC, Supplier 1="Arrow Electronics", Supplier Part Number 1=0603B103K101CT, Voltage Rating (DC)=100V
C17 C18: library part CC1206KKX7RDBB102, "Multilayer Ceramic Capacitor, 1000 pF, 2000 V, ± 10%, X7R, 1206 [3216 Metric]", Capacitance=1nF, Case Code (Imperial)=1206, Case Code (Metric)=3216, Dielectric=X7R, Insulation Resistance=10GR, Manufacturer=Yageo, Max Operating Temperature=125°C, Min Operating Temperature=-55°C, Package Quantity=1, Supplier Part Number=C23631, Supplier Part Number 1=2008092, Tolerance=10%, Voltage=2kV, Case/Package=1206, Category="Ceramic Capacitors", ComponentLink1Description=https://datasheet.ciiva.com/23942/1449957-23942422.pdf?src-supplier=Newark, ComponentLink1URL=https://datasheet.ciiva.com/23942/1449957-23942422.pdf?src-supplier=Newark, ComponentLink2Description=https://datasheet.ciiva.com/186/upy-np0x7r-hv-1kv-to-3kv-4-186736.pdf?src-supplier=Digi-Key, ComponentLink2URL=https://datasheet.ciiva.com/186/upy-np0x7r-hv-1kv-to-3kv-4-186736.pdf?src-supplier=Digi-Key, ComponentLink3Description=https://datasheet.ciiva.com/186/upy-np0x7r-hv-1kv-to-3kv-4-186735.pdf?src-supplier=Digi-Key, ComponentLink3URL=https://datasheet.ciiva.com/186/upy-np0x7r-hv-1kv-to-3kv-4-186735.pdf?src-supplier=Digi-Key, ComponentLink4Description=https://datasheet.ciiva.com/186/upy-np0x7r-hv-1kv-to-3kv-4-186737.pdf?src-supplier=Digi-Key, ComponentLink4URL=https://datasheet.ciiva.com/186/upy-np0x7r-hv-1kv-to-3kv-4-186737.pdf?src-supplier=Digi-Key, ComponentLink5Description=https://datasheet.ciiva.com/13386/upy-gp-np0-16v-to-50v-8-13386312.pdf?src-supplier=Mouser, ComponentLink5URL=https://datasheet.ciiva.com/13386/upy-gp-np0-16v-to-50v-8-13386312.pdf?src-supplier=Mouser, ComponentLink6Description=LCSC, ComponentLink6URL=https://www.lcsc.com/product-detail/Multilayer-Ceramic-Capacitors-MLCC-SMD-SMT_YAGEO-CC1206KKX7RDBB102_C23631.html, Construction=Flat, Depth=1.6mm, Dissipation Factor=2.5%, Height=1.25mm, Lead Free="Lead Free", Length=3.2mm, Manufacturer Part Number=CC1206KKX7RDBB102, Material=4241ConductorMaterial, Mount="Surface Mount", Number of Pins=2, Packaging="Tape and Reel", Pricing 1="3000=0.0177, 9000=0.0171, 30000=0.0164, 60000=0.016, 120000=0.0154 (USD)", Radiation Hardening=No, Reach SVHC Compliant=Unknown, RoHS=Yes, RoHS Compliant=Yes, Series=CC, Stock 1=1107000, Supplier=LCSC, Supplier 1="Future Electronics", Termination=SMD/SMT, Thickness=0.057inch, Voltage Rating=2kV, Voltage Rating (DC)=2kV, Width=0.063inch
CONN1: "RJ45 RJReceptacle 1 有屏蔽 Right-Angle WithLED 0℃~+70℃ Plugin Ethernet Connectors/Modular Connectors (RJ45 RJ11) ROHS", Manufacturer=Ckmtw, Supplier Part Number=C386757, ComponentLink1Description=LCSC, ComponentLink1URL=https://www.lcsc.com/product-detail/Ethernet-Connectors-Modular-Connectors-RJ45-RJ11_Ckmtw-Shenzhen-Cankemeng-R-RJ45R08P-C000_C386757.html, Manufacturer Part Number=R-RJ45R08P-C000, Supplier=LCSC
CONN2: "Jack Modular Connector RJ45 Through Hole Shielded", Manufacturer=Kinghelm, Supplier Part Number=C2683357, ComponentLink1Description=LCSC, ComponentLink1URL=https://www.lcsc.com/product-detail/C2683357.html?spm=wm.fly.bg.28.xh&lcsc_vid=QlNcX1QCFlleAgYFTwAPUwdVRFJdA1ICT1MNBVIAEVgxVlNRQVFbUFdRT1VfXzsOAxUeFF5JWBYZEEoKFBINSQcJGk4%3D, Manufacturer Part Number=KH-5224-8P8C, Supplier=LCSC
CONN3: "2.0 x 6.0 mm, 5.0 A, Horizontal, Through Hole, Pick-n-Place Top, Dc Power Jack Connector", Current Rating=5A, Manufacturer="Same Sky", Max Operating Temperature=85°C, Min Operating Temperature=-25°C, Supplier Part Number=C3096089, Supplier Part Number 1=CP-050AH-ND, Voltage Rating=24V, Category="Power Connectors", ComponentLink1Description=https://datasheet.octopart.com:443/PJ-050AH-Same-Sky-datasheet-188849567.pdf?src-supplier=Same+Sky, ComponentLink1URL=https://datasheet.octopart.com:443/PJ-050AH-Same-Sky-datasheet-188849567.pdf?src-supplier=Same+Sky, ComponentLink2Description=https://datasheet.octopart.com:443/PJ-050AH-Same-Sky-datasheet-181917340.pdf?src-supplier=Same+Sky, ComponentLink2URL=https://datasheet.octopart.com:443/PJ-050AH-Same-Sky-datasheet-181917340.pdf?src-supplier=Same+Sky, ComponentLink3Description=https://datasheet.octopart.com:443/PJ-050AH-Same-Sky-datasheet-181917339.pdf?src-supplier=Same+Sky, ComponentLink3URL=https://datasheet.octopart.com:443/PJ-050AH-Same-Sky-datasheet-181917339.pdf?src-supplier=Same+Sky, ComponentLink4Description=https://datasheet.octopart.com:443/PJ-050AH-CUI-Devices-datasheet-175924817.pdf?src-supplier=Same+Sky, ComponentLink4URL=https://datasheet.octopart.com:443/PJ-050AH-CUI-Devices-datasheet-175924817.pdf?src-supplier=Same+Sky, ComponentLink5Description=https://datasheet.octopart.com:443/PJ-050AH-CUI-Devices-datasheet-137941395.pdf?src-supplier=Same+Sky, ComponentLink5URL=https://datasheet.octopart.com:443/PJ-050AH-CUI-Devices-datasheet-137941395.pdf?src-supplier=Same+Sky, ComponentLink6Description=https://datasheet.octopart.com:443/PJ-050AH-CUI-Devices-datasheet-180437501.pdf?src-supplier=IHS, ComponentLink6URL=https://datasheet.octopart.com:443/PJ-050AH-CUI-Devices-datasheet-180437501.pdf?src-supplier=IHS, ComponentLink7Description=https://datasheet.octopart.com:443/PJ-050AH-Same-Sky-datasheet-190141980.pdf?src-supplier=element14+APAC, ComponentLink7URL=https://datasheet.octopart.com:443/PJ-050AH-Same-Sky-datasheet-190141980.pdf?src-supplier=element14+APAC, ComponentLink8Description=https://datasheet.octopart.com:443/PJ-050AH-Same-Sky-datasheet-182880940.pdf?src-supplier=Electro+Sonic, ComponentLink8URL=https://datasheet.octopart.com:443/PJ-050AH-Same-Sky-datasheet-182880940.pdf?src-supplier=Electro+Sonic, ComponentLink9Description=https://datasheet.octopart.com:443/PJ-050AH-CUI-Devices-datasheet-175925602.pdf?src-supplier=Master+Electronics, ComponentLink9URL=https://datasheet.octopart.com:443/PJ-050AH-CUI-Devices-datasheet-175925602.pdf?src-supplier=Master+Electronics, ComponentLink10Description=https://datasheet.octopart.com:443/PJ-050AH-CUI-Devices-datasheet-141000282.pdf?src-supplier=Master+Electronics, ComponentLink10URL=https://datasheet.octopart.com:443/PJ-050AH-CUI-Devices-datasheet-141000282.pdf?src-supplier=Master+Electronics, ComponentLink11Description=https://datasheet.octopart.com:443/PJ-050AH-CUI-Devices-datasheet-103111417.pdf?src-supplier=Master+Electronics, ComponentLink11URL=https://datasheet.octopart.com:443/PJ-050AH-CUI-Devices-datasheet-103111417.pdf?src-supplier=Master+Electronics, ComponentLink12Description=https://datasheet.octopart.com:443/PJ-050AH-Same-Sky-datasheet-189105235.pdf?src-supplier=Master+Electronics, ComponentLink12URL=https://datasheet.octopart.com:443/PJ-050AH-Same-Sky-datasheet-189105235.pdf?src-supplier=Master+Electronics, ComponentLink13Description=https://datasheet.octopart.com:443/PJ-050AH-Same-Sky-datasheet-182049891.pdf?src-supplier=Future+Electronics, ComponentLink13URL=https://datasheet.octopart.com:443/PJ-050AH-Same-Sky-datasheet-182049891.pdf?src-supplier=Future+Electronics, ComponentLink14Description=https://datasheet.octopart.com:443/PJ-050AH-CUI-Devices-datasheet-175923567.pdf?src-supplier=Future+Electronics, ComponentLink14URL=https://datasheet.octopart.com:443/PJ-050AH-CUI-Devices-datasheet-175923567.pdf?src-supplier=Future+Electronics, ComponentLink15Description=https://datasheet.octopart.com:443/PJ-050AH-CUI-Devices-datasheet-137760689.pdf?src-supplier=Future+Electronics, ComponentLink15URL=https://datasheet.octopart.com:443/PJ-050AH-CUI-Devices-datasheet-137760689.pdf?src-supplier=Future+Electronics, ComponentLink16Description=https://datasheet.octopart.com:443/PJ-050AH-CUI-Devices-datasheet-175927643.pdf?src-supplier=CUI+Devices+SCT, ComponentLink16URL=https://datasheet.octopart.com:443/PJ-050AH-CUI-Devices-datasheet-175927643.pdf?src-supplier=CUI+Devices+SCT, ComponentLink17Description=https://datasheet.octopart.com:443/PJ-050AH-CUI-Devices-datasheet-142370881.pdf?src-supplier=CUI+Devices+SCT, ComponentLink17URL=https://datasheet.octopart.com:443/PJ-050AH-CUI-Devices-datasheet-142370881.pdf?src-supplier=CUI+Devices+SCT, ComponentLink18Description=https://octopart.com:443/opatz8j6/c1?t=i1HNAP8sau4DI-LZx3jDgI0-SWlYt3fLx_IRO_2-_sGd8kJlzHOsJDbcJeITI66mPXy8W__Xgt3piNIobSJpvViutKRXA4bS4Nrz0A8VAN4c8JG51UBHIn2tin4HAiUxuxhA7LdmnYlJsfGQu4wYFxkunNJbmBP4RDTvO_9ujz0txzSwc7TQjMJP2liQb9TTCHcH4_0bcC0I0RPZ1OY3ZJDDsG_xX9EgIXLeakTO5TNd2iYSdlOWFMgXhUfzV2AZOxi4wCzVrZ3pS8qpnh6vhskC-yXDoQGycuq9NoVRigowJ_F47T6Jf_exHFrpKD5_tLQCHcwME9nRgdOqiRs_2Sf2sHpBOw&src-supplier=Compliance+Statements, ComponentLink18URL=https://octopart.com:443/opatz8j6/c1?t=i1HNAP8sau4DI-LZx3jDgI0-SWlYt3fLx_IRO_2-_sGd8kJlzHOsJDbcJeITI66mPXy8W__Xgt3piNIobSJpvViutKRXA4bS4Nrz0A8VAN4c8JG51UBHIn2tin4HAiUxuxhA7LdmnYlJsfGQu4wYFxkunNJbmBP4RDTvO_9ujz0txzSwc7TQjMJP2liQb9TTCHcH4_0bcC0I0RPZ1OY3ZJDDsG_xX9EgIXLeakTO5TNd2iYSdlOWFMgXhUfzV2AZOxi4wCzVrZ3pS8qpnh6vhskC-yXDoQGycuq9NoVRigowJ_F47T6Jf_exHFrpKD5_tLQCHcwME9nRgdOqiRs_2Sf2sHpBOw&src-supplier=Compliance+Statements, ComponentLink19Description=https://octopart.com:443/opatz8j6/c1?t=wghVw_L1We_XWVlVY8JyDPw6lxvMinRws7-ARU-VAWs-ryFcBuT4vQKX4NLeCdwIA5aNEyug047cBfxCvivV2siU9ei9l80cJNjSbW06i8UrCY_EzWCp-dyawC3hrJNXrvZBXw-IQXK5amSqRYS1pt4_DqC-jT23v6yNOp-UfvUw-7gTEcBL8SujWfUUfSgsI8u124iBLyBSRX1OLjM7MRIPYR4R97L9CtcepMoCH6l_FDhW7at-B344Ry8AMoz31TQfvrWYgCManlUz1zqOBKOHlrNi2ifiEYHdtYXUYuwDLdPu8m0ipxZrudx8zgq-sTX51For5OOvefaN7lFtuiKG6VH6xbMjNYw&src-supplier=Compliance+Statements, ComponentLink19URL=https://octopart.com:443/opatz8j6/c1?t=wghVw_L1We_XWVlVY8JyDPw6lxvMinRws7-ARU-VAWs-ryFcBuT4vQKX4NLeCdwIA5aNEyug047cBfxCvivV2siU9ei9l80cJNjSbW06i8UrCY_EzWCp-dyawC3hrJNXrvZBXw-IQXK5amSqRYS1pt4_DqC-jT23v6yNOp-UfvUw-7gTEcBL8SujWfUUfSgsI8u124iBLyBSRX1OLjM7MRIPYR4R97L9CtcepMoCH6l_FDhW7at-B344Ry8AMoz31TQfvrWYgCManlUz1zqOBKOHlrNi2ifiEYHdtYXUYuwDLdPu8m0ipxZrudx8zgq-sTX51For5OOvefaN7lFtuiKG6VH6xbMjNYw&src-supplier=Compliance+Statements, ComponentLink20Description=https://octopart.com:443/opatz8j6/c1?t=2_WbWo_pjT-AGMZJ9OQyYCnH7mubsPdZALBDoVNei6KrV_IJjYFhq8H0kH6bJt5HXLU_kSM462KjxS6S93sfBWBhXllcdMUOW5uUkFoO8Z-X-V9fHvlvoFqHTLFpSA2_nIMsODPkX3eq3Z_QcS6RZ0G0moIALLZaz5osZaUUtGDom_OSRSJJ983Ee6OC2wkAKsSF_mfcXI5Hw5uKrkMhLylyvUVHrLyCkIp7sDv8gEkhEgjpLCTJ6fzmZzlstrZUr7VR9KoJzewnrvBxvFLR-UjI8AZw4Tnb4SG4kqVxv10bMQ-fg732zY5MnvzV3ohKdJvlg_bIkjJxFpuQir69v0P-Xf72NA&src-supplier=Compliance+Statements, ComponentLink20URL=https://octopart.com:443/opatz8j6/c1?t=2_WbWo_pjT-AGMZJ9OQyYCnH7mubsPdZALBDoVNei6KrV_IJjYFhq8H0kH6bJt5HXLU_kSM462KjxS6S93sfBWBhXllcdMUOW5uUkFoO8Z-X-V9fHvlvoFqHTLFpSA2_nIMsODPkX3eq3Z_QcS6RZ0G0moIALLZaz5osZaUUtGDom_OSRSJJ983Ee6OC2wkAKsSF_mfcXI5Hw5uKrkMhLylyvUVHrLyCkIp7sDv8gEkhEgjpLCTJ6fzmZzlstrZUr7VR9KoJzewnrvBxvFLR-UjI8AZw4Tnb4SG4kqVxv10bMQ-fg732zY5MnvzV3ohKdJvlg_bIkjJxFpuQir69v0P-Xf72NA&src-supplier=Compliance+Statements, ComponentLink21Description=https://octopart.com:443/opatz8j6/c1?t=8DYyr6UACYp_9EHoBQOMUJpe-oai5MtZyHfGsF7pMfqiyjsSsAlZxyG1X-4M3zPZXZjKmQkWcUbU005QJnBJ0VVRjtjOP6E0jnpPkUsKcjC4aqrxFP9fuOKb9IumRhvlA-YeXV-s67AJ9Ft3kafBMu_ZrryxXHEyusfRGv_sESHb_v2cGG7yXqcLMHQYIXRg53oH9-p2USlc4h_2uVf8lrwAuzWLZ-jnEAs8ZLSn6kwl23auHyfukigGyZzktJhlMS-c6-ffI1F_xetVy8m-uNDLnjE63CcaC0sp0xpLMmAGVVIs7dvYX1LTvWTLU-CH_THFZcN-5NbFwrXCu7zChi3WwqkNelJ-7s0&src-supplier=Compliance+Statements, ComponentLink21URL=https://octopart.com:443/opatz8j6/c1?t=8DYyr6UACYp_9EHoBQOMUJpe-oai5MtZyHfGsF7pMfqiyjsSsAlZxyG1X-4M3zPZXZjKmQkWcUbU005QJnBJ0VVRjtjOP6E0jnpPkUsKcjC4aqrxFP9fuOKb9IumRhvlA-YeXV-s67AJ9Ft3kafBMu_ZrryxXHEyusfRGv_sESHb_v2cGG7yXqcLMHQYIXRg53oH9-p2USlc4h_2uVf8lrwAuzWLZ-jnEAs8ZLSn6kwl23auHyfukigGyZzktJhlMS-c6-ffI1F_xetVy8m-uNDLnjE63CcaC0sp0xpLMmAGVVIs7dvYX1LTvWTLU-CH_THFZcN-5NbFwrXCu7zChi3WwqkNelJ-7s0&src-supplier=Compliance+Statements, ComponentLink22Description=DigiKey, ComponentLink22URL=https://www.digikey.com/en/products/detail/same-sky-formerly-cui-devices/PJ-050AH/1644583, ComponentLink23Description=LCSC, ComponentLink23URL=https://www.lcsc.com/product-detail/C3096089.html?s_z=n_PJ-050AH, Contact Plating=Silver, Export Control Classification Number (ECCN) Code=EAR99, Harmonized Tariff Schedule (HTS) Code=8536.69.40.20, Inside Diameter=2mm, Introduction Date=2018-06-13, Lifecycle Status=Production, Manufacturer Part Number=PJ-050AH, Mount="Through Hole", Number of Conductors=2, Number of Pins=2, Orientation=Horizontal, Outside Diameter=6mm, Pricing 1="1=1.16, 10=0.988, 25=0.9256, 50=0.8814, 100=0.8393, 250=0.78672, 500=0.74916, 1000=0.71339, 2500=0.66873 (USD)", REACH SVHC=Yes, RoHS=Compliant, Schedule B="8536695050, 8536695050|8536695050, 8536695050|8536695050|8536695050, 8536695050|8536695050|8536695050|8536695050", Shielding=Unshielded, Stock 1=43845, Supplier=LCSC, Supplier 1=DigiKey, Voltage Rating (DC)=24V
D1 D2 D3 D4 D7 D8 D9 D10: "60V 700mV@3A 3A SMA(DO-214AC) Schottky Barrier Diodes (SBD) ROHS", Manufacturer=MDD, Supplier Part Number=C16015, ComponentLink1Description=LCSC, ComponentLink1URL=https://www.lcsc.com/product-detail/Schottky-Barrier-Diodes-SBD_MDD-Microdiode-Electronics-SS36_C16015.html, Manufacturer Part Number=SS36, Supplier=LCSC
D5: "Diode TVS Single Uni-Dir 30V 400W 2-Pin SMA", Breakdown Voltage=33.3V, Case/Package=SMA, Clamping Voltage=48.4V, Leakage Current=1uA, Manufacturer=Littelfuse, Max Breakdown Voltage=36.8V, Max Operating Temperature=150°C, Max Power Dissipation=3.3W, Max Surge Current=8.3A, Min Operating Temperature=-65°C, Operating Supply Voltage=30V, Package Quantity=5000, Peak Pulse Power=400W, Power Line Protection=No, Resistor Type=Zener, Supplier Part Number=C148230, Test Current=1mA, Category="TVS Diodes", ComponentLink1Description=https://datasheet.ciiva.com/25624/0900766b810f4edb-25624874.pdf?src-supplier=RSComponents, ComponentLink1URL=https://datasheet.ciiva.com/25624/0900766b810f4edb-25624874.pdf?src-supplier=RSComponents, ComponentLink2Description=https://datasheet.ciiva.com/22638/607617-22638012.pdf?src-supplier=Element14, ComponentLink2URL=https://datasheet.ciiva.com/22638/607617-22638012.pdf?src-supplier=Element14, ComponentLink3Description=https://datasheet.ciiva.com/14162/smaj-eng-ds-14162071.pdf?src-supplier=Distrelec, ComponentLink3URL=https://datasheet.ciiva.com/14162/smaj-eng-ds-14162071.pdf?src-supplier=Distrelec, ComponentLink4Description=https://datasheet.ciiva.com/5771/littelfuse-tvs-diode-smaj-5771023.pdf?src-supplier=Farnell, ComponentLink4URL=https://datasheet.ciiva.com/5771/littelfuse-tvs-diode-smaj-5771023.pdf?src-supplier=Farnell, ComponentLink5Description=https://datasheet.ciiva.com/8062/littelfuse-tvs-diode-smaj-8062298.pdf?src-supplier=Element14, ComponentLink5URL=https://datasheet.ciiva.com/8062/littelfuse-tvs-diode-smaj-8062298.pdf?src-supplier=Element14, ComponentLink6Description=https://datasheet.ciiva.com/330/littelfuse-tvs-diode-smaj-datasheet-pdf-330695.pdf?src-supplier=Digi-Key, ComponentLink6URL=https://datasheet.ciiva.com/330/littelfuse-tvs-diode-smaj-datasheet-pdf-330695.pdf?src-supplier=Digi-Key, ComponentLink7Description=https://datasheet.ciiva.com/330/littelfuse-tvs-diode-smaj-datasheet-pdf-330696.pdf?src-supplier=Digi-Key, ComponentLink7URL=https://datasheet.ciiva.com/330/littelfuse-tvs-diode-smaj-datasheet-pdf-330696.pdf?src-supplier=Digi-Key, ComponentLink8Description=https://datasheet.ciiva.com/330/littelfuse-tvs-diode-smaj-datasheet-pdf-330694.pdf?src-supplier=Digi-Key, ComponentLink8URL=https://datasheet.ciiva.com/330/littelfuse-tvs-diode-smaj-datasheet-pdf-330694.pdf?src-supplier=Digi-Key, ComponentLink9Description=LCSC, ComponentLink9URL=https://www.lcsc.com/product-detail/C148230.html?s_z=n_SMAJ30A, Direction=Unidirectional, Element Configuration=Single, Height=2.087mm, Lead Free="Lead Free", Length=4.5mm, Manufacturer Part Number=SMAJ30A, Max Reverse Leakage Current=1uA, Min Breakdown Voltage=33.3V, Mount="Surface Mount", Number of Channels=1, Number of Elements=1, Number of Pins=2, Number of Unidirectional Channels=1, Packaging="Tape and Reel", Peak Pulse Current=8.3A, Polarity=Unidirectional, Power Dissipation=400W, Pricing 1="25=0.34200, 50=0.28200, 100=0.27200, 200=0.26800, 400=0.26200 (USD)", Radiation Hardening=No, REACH SVHC="No SVHC", Reverse Breakdown Voltage=33.3V, Reverse Standoff Voltage=30V, RoHS=Yes, RoHS Compliant=Yes, Stock 1=200, Supplier=LCSC, Supplier 1=RSComponents, Termination=SMD/SMT, Voltage Rating (DC)=30V, Width=2.79mm
D6: "4.3A 400W 93.6V 64.4V 58V SMA(DO-214AC) TVS ROHS", Manufacturer=GOODWORK, Supplier Part Number=C2980408, ComponentLink1Description=LCSC, ComponentLink1URL=https://www.lcsc.com/product-detail/TVS_GOODWORK-SMAJ58A_C2980408.html, Manufacturer Part Number=SMAJ58A, Supplier=LCSC
D12: library part MHK33147CGBTD, "20mA 30mcd 雾状绿透镜 -40℃~+85℃ 568nm Green 60° 2.6V DIP-6-2.54mm Light Emitting Diodes (LED) ROHS", Manufacturer=MEIHUA, Supplier Part Number=C7470849, ComponentLink1Description=LCSC, ComponentLink1URL=https://www.lcsc.com/product-detail/Light-Emitting-Diodes-LED_MEIHUA-MHK33147CGBTD_C7470849.html, Manufacturer Part Number=MHK33147CGBTD, Supplier=LCSC
FB1 FB2: library part FBMH4525HM102NTV, "Ind Chip Bead Multi-Layer 1KOhm 30% 100MHz Ferrite 3A 1810 T/R", Case Code (Imperial)=1810, Case Code (Metric)=4525, Current Rating=3A, DC Resistance (DCR)=60mΩ, Manufacturer="TAIYO YUDEN", Max Operating Temperature=125°C, Min Operating Temperature=-40°C, Ratings=AEC-Q200, Resistance=1kΩ, Supplier Part Number=C515372, Supplier Part Number 1=587-3839-1-ND, Test Frequency=100MHz, Tolerance=30%, Case/Package=1810, Category="Ferrite Beads and Chips", ComponentLink1Description=https://datasheet.octopart.com:443/FBMH4525HM102NTV-Taiyo-Yuden-datasheet-153594123.pdf?src-supplier=IHS, ComponentLink1URL=https://datasheet.octopart.com:443/FBMH4525HM102NTV-Taiyo-Yuden-datasheet-153594123.pdf?src-supplier=IHS, ComponentLink2Description=https://datasheet.octopart.com:443/FBMH4525HM102NTV-Taiyo-Yuden-datasheet-112254973.pdf?src-supplier=Master+Electronics, ComponentLink2URL=https://datasheet.octopart.com:443/FBMH4525HM102NTV-Taiyo-Yuden-datasheet-112254973.pdf?src-supplier=Master+Electronics, ComponentLink3Description=DigiKey, ComponentLink3URL=https://www.digikey.com/en/products/detail/taiyo-yuden/FBMH4525HM102NTV/4875437, ComponentLink4Description=JLCPCB, ComponentLink4URL=https://jlcpcb.com/partdetail/TaiyoYuden-FBMH4525HM102NTV/C515372, Export Control Classification Number (ECCN) Code=EAR99, Harmonized Tariff Schedule (HTS) Code=8504.50.80.00, Height=2.5mm, Impedance=1kΩ, Introduction Date=2013-09-23, Length=4.5mm, Lifecycle Status=Production, Manufacturer Part Number=FBMH4525HM102NTV, Max Current Rating=3A, Max DC Current=3A, Max Length=4.9mm, Max Thickness=2.8mm, Max Width=2.8mm, Min Length=4.1mm, Min Thickness=2.2mm, Min Width=2.2mm, Mount="Surface Mount", Number of Circuits=1, Number of Lines=1, Number of Terminals=2, Packaging="Cut Tape (CT)", Pricing 1="1=1.3, 10=0.909, 25=0.7796, 50=0.6908, 100=0.6084, 250=0.5202 (USD)", REACH SVHC=Yes, RoHS=Compliant, Schedule B=8504500000, Stock 1=1225, Supplier=LCSC, Supplier 1=DigiKey, Termination=SMD/SMT, Width=2.5mm
J1: "1x4P -40℃~+105℃ 13.5A 250V Green 16~28 Straight pin 3.5mm 1 1 4 Plugin,P=3.5mm Screw terminal ROHS", Manufacturer=DIBO, Supplier Part Number=C2757925, ComponentLink1Description=LCSC, ComponentLink1URL=https://www.lcsc.com/product-detail/Screw-terminal_DIBO-DB125-3-5-4P-GN-S_C2757925.html, Manufacturer Part Number=DB125-3.5-4P-GN-S, Supplier=LCSC
J2 J5 J6 J7: "Straight Square Pins 2.5mm 6mm -40℃~+105℃ 1 3mm 2 2.54mm Black Brass 1x2P Plugin,P=2.54mm Pin Headers ROHS", Manufacturer=XFCN, Supplier Part Number=C492401, Manufacturer Part Number=PZ254V-11-02P, Supplier=LCSC
J3 J4: library part Solder_Jumper_3
J8: "250V 3A Straight Square Pins 2.5mm 4P 6mm -40℃~+105℃ 3mm 2.54mm Plugin Black 1x4P Plugin,P=2.54mm Pin Headers ROHS", Manufacturer=XFCN, Supplier Part Number=C2691448, ComponentLink1Description=LCSC, ComponentLink1URL=https://www.lcsc.com/product-detail/Pin-Headers_XFCN-PZ254V-11-04P_C2691448.html, Manufacturer Part Number=PZ254V-11-04P, Supplier=LCSC
J9: "TERM BLK 2P TOP ENTRY 2.5MM PCB", Color=Black, Current=5A, Current Rating=6A, Flammability Rating="UL94 V-0", Manufacturer="Phoenix Contact", Package Quantity=310, Supplier Part Number=C3817232, Supplier Part Number 1=277-2086-1-ND, Voltage=150V, Voltage Rating=200V, Category="Terminal Blocks", ComponentLink1Description=https://datasheet.ciiva.com/824/1770953-824227.pdf?src-supplier=Digi-Key, ComponentLink1URL=https://datasheet.ciiva.com/824/1770953-824227.pdf?src-supplier=Digi-Key, ComponentLink2Description=https://datasheet.ciiva.com/29121/567312-da-01-de-printklemme-1770953-310-st-29121147.pdf?src-supplier=Conrad, ComponentLink2URL=https://datasheet.ciiva.com/29121/567312-da-01-de-printklemme-1770953-310-st-29121147.pdf?src-supplier=Conrad, ComponentLink3Description=https://datasheet.ciiva.com/824/1770953-824228.pdf?src-supplier=Digi-Key, ComponentLink3URL=https://datasheet.ciiva.com/824/1770953-824228.pdf?src-supplier=Digi-Key, ComponentLink4Description=LCSC, ComponentLink4URL=1770953, Contact Plating=Tin, Housing Color=Black, Housing Material=Polymer, Lead Free="Lead Free", Length=5mm, Manufacturer Part Number=1770953, Mount="Through Hole", Number of Levels=1, Number of Poles=2, Number of Positions=2, Number of Positions Per Level=2, Orientation=Vertical, Packaging="Tape and Reel", Pitch=2.5mm, Pricing 1="1=0.60000, 10=0.58000, 50=0.55440, 100=0.53930 (USD)", RoHS=Yes, Stock 1=1488, Supplier=LCSC, Supplier 1=Digi-Key, Termination=Screwless, Wire Gauge (Max)=26AWG, Wire Gauge (Min)=24AWG
MP1 MP2 MP3 MP4: "M3 Round Nut 8mm height", Manufacturer=YIYUAN, Supplier Part Number=C5301772, ComponentLink1Description=LCSC, ComponentLink1URL=https://www.lcsc.com/product-detail/Other-nuts_YIYUAN-SMTSOM380BTR_C5301772.html, Manufacturer Part Number=SMTSOM380BTR, Supplier=LCSC
Q1 Q2: "N-Channel 60V 60A 45W PRPAK3x3-8L", Drain Current Id=60A, Manufacturer=HUASHUO, ComponentLink1Description=LCSC, ComponentLink1URL=https://www.lcsc.com/product-detail/C2828498.html, Manufacturer Part Number=HSBB6066, Rdson=5.2mOhm, Supplier=LCSC, Supplier Part Number=HSBB6066, Vds=60V
R1: library part RC0805JR-070RL, "Surface Mount Thick Film Resistor, RC Series, 125 mW, - 5%, 150 V, 0805 [2012 Metric]", Case Code (Imperial)=0805, Case Code (Metric)=2012, Manufacturer=Yageo, Max Operating Temperature=155°C, Max Power Dissipation=125mW, Min Operating Temperature=-55°C, Resistance=0mR, Resistance Tolerance=5%, Resistor Type="Thick Film", Temperature Coefficient=200ppm/°C, Voltage Rating=150V, Case/Package=0805, Category="Chip SMD Resistors", ComponentLink1Description=https://datasheet.ciiva.com/11819/0900766b8106beab-11819430.pdf?src-supplier=RSComponents, ComponentLink1URL=https://datasheet.ciiva.com/11819/0900766b8106beab-11819430.pdf?src-supplier=RSComponents, ComponentLink2Description=https://datasheet.ciiva.com/7941/1738694-7941861.pdf?src-supplier=Element14, ComponentLink2URL=https://datasheet.ciiva.com/7941/1738694-7941861.pdf?src-supplier=Element14, ComponentLink3Description=https://datasheet.ciiva.com/7941/1738694-7941862.pdf?src-supplier=Element14, ComponentLink3URL=https://datasheet.ciiva.com/7941/1738694-7941862.pdf?src-supplier=Element14, ComponentLink4Description=https://datasheet.ciiva.com/7941/1738694-7941863.pdf?src-supplier=Element14, ComponentLink4URL=https://datasheet.ciiva.com/7941/1738694-7941863.pdf?src-supplier=Element14, ComponentLink5Description=https://datasheet.ciiva.com/15190/getdatasheetpartid-330685-15190028.pdf?src-supplier=Verical, ComponentLink5URL=https://datasheet.ciiva.com/15190/getdatasheetpartid-330685-15190028.pdf?src-supplier=Verical, Construction=Rectangular, Contact Plating=Tin,Matte, Depth=1.25mm, Features="Moisture Resistant", Height=0.5mm, Lead Free="Lead Free", Length=2mm, Manufacturer Part Number=RC0805JR-070RL, Military Standard=Not, Number of Pins=2, Number of Terminations=2, Packaging="Tape and Reel", Power Rating=125mW, Pricing 1="5000=0.00430, 10000=0.00390, 25000=0.00350, 50000=0.00270 (USD)", Radiation Hardening=No, REACH SVHC=Unknown, RoHS=Yes, RoHS Compliant=Yes, Series=RC, Size Code=0805, Stock 1=5861000, Supplier 1="Arrow Electronics", Supplier Part Number 1=RC0805JR-070RL, Technology="THICK FILM", Termination=SMD/SMT, Tolerance=5%, Voltage Rating (DC)=150V, Width=1.25mm
R2 R3 R23: library part "R0603 0R 1% 100mW", "Thick Film Resistors - SMD RMC 0603 1/10W 1% T/R-5000", Manufacturer="Royal Ohm", Manufacturer Part Number=0603WAF0000T5E, Resistance=0Ω, Supplier Part Number=C21189, Supplier Part Number 1=303-0603WAF0000T5E, Category=Uncategorized, ComponentLink1Description=https://datasheet.octopart.com:443/0603WAF0000T5E-Royal-Ohm-datasheet-165785611.pdf?src-supplier=TME, ComponentLink1URL=https://datasheet.octopart.com:443/0603WAF0000T5E-Royal-Ohm-datasheet-165785611.pdf?src-supplier=TME, ComponentLink2Description=https://datasheet.octopart.com:443/0603WAF0000T5E-Royal-Ohm-datasheet-157855877.pdf?src-supplier=TME, ComponentLink2URL=https://datasheet.octopart.com:443/0603WAF0000T5E-Royal-Ohm-datasheet-157855877.pdf?src-supplier=TME, ComponentLink3Description=https://datasheet.octopart.com:443/0603WAF0000T5E-Royal-Ohm-datasheet-62069544.pdf?src-supplier=TME, ComponentLink3URL=https://datasheet.octopart.com:443/0603WAF0000T5E-Royal-Ohm-datasheet-62069544.pdf?src-supplier=TME, ComponentLink4Description=JLCPCB, ComponentLink4URL=https://jlcpcb.com/partdetail/21903-0603WAF0000T5E/C21189, Pricing 1="10000=0.001 (USD)", Stock 1=75000, Supplier=LCSC, Supplier 1=Mouser